# Altium PCB cs301_Group11.PcbDoc
Units mm, origin at the board's own origin, x right, y up, seen from the top; angles counter-clockwise.
Board outline 87.88 x 127 mm, 2 copper layers (Top Layer, Bottom Layer); 106 components, 62 nets, 315 pads, 24 vias.
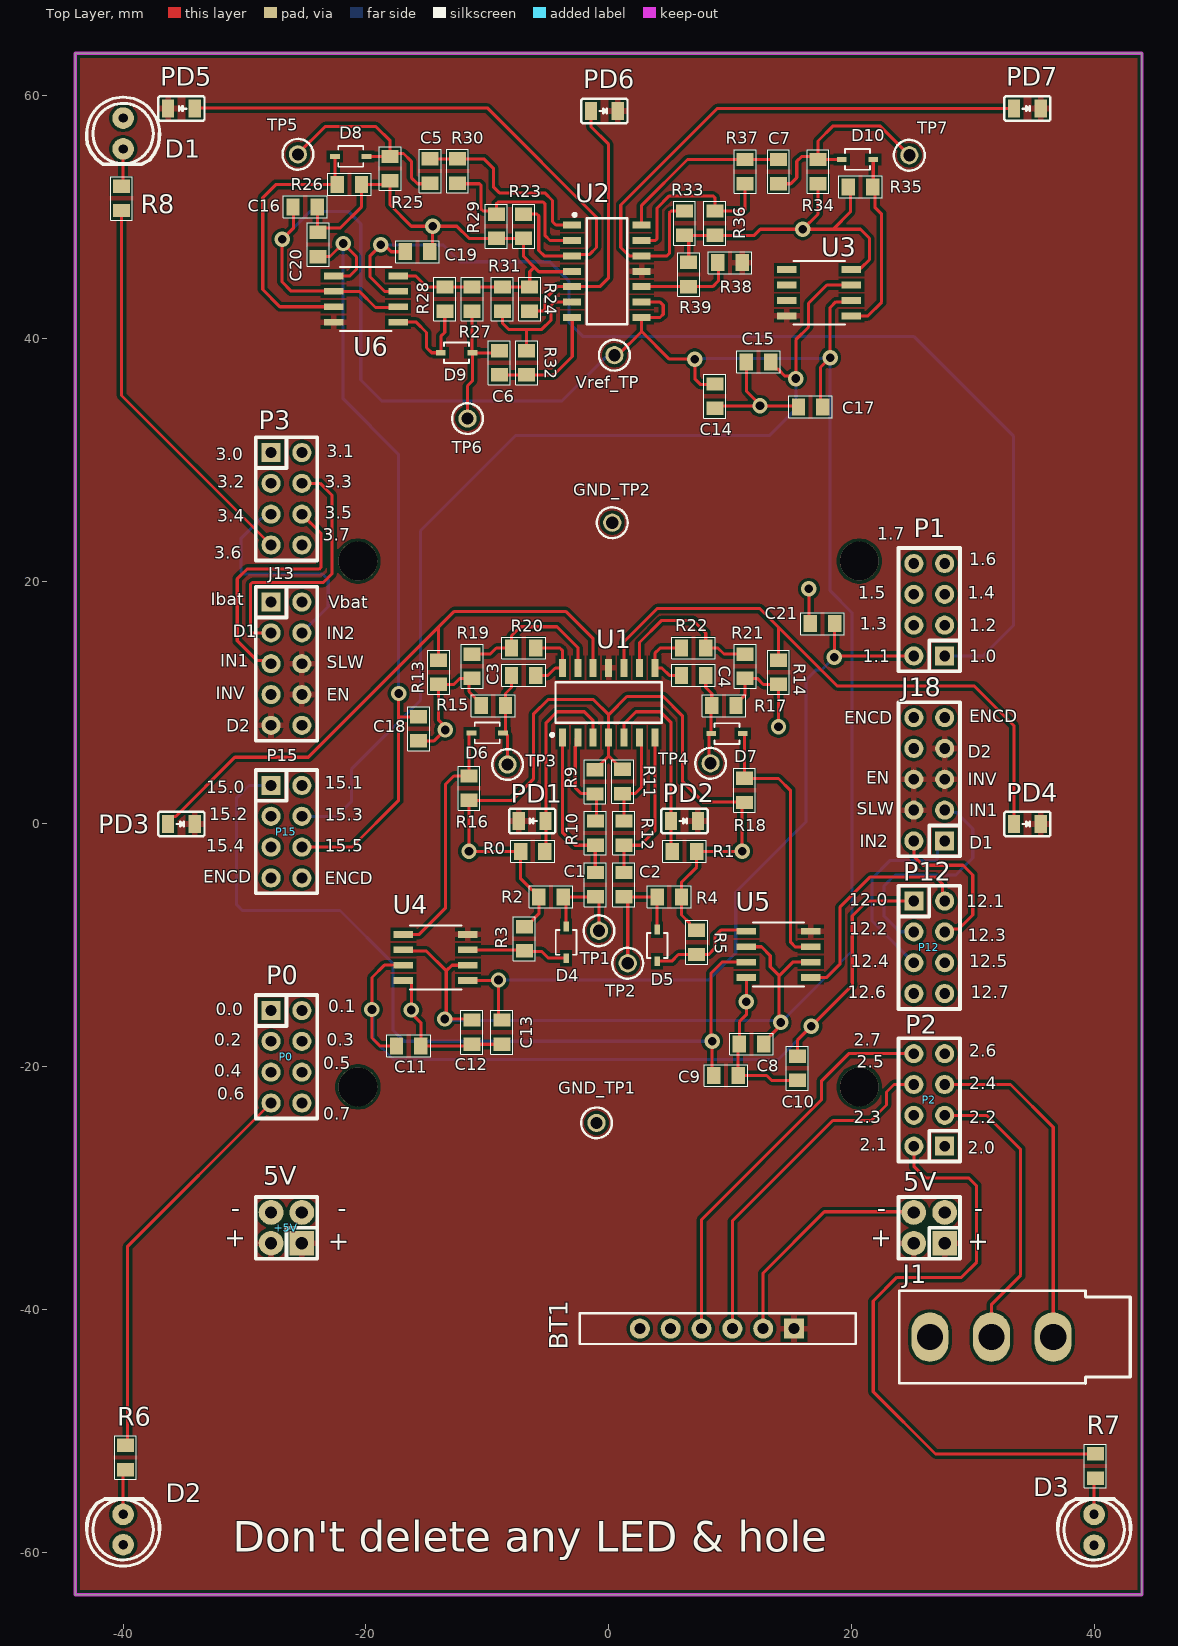
[diagram p0: Top Layer view]
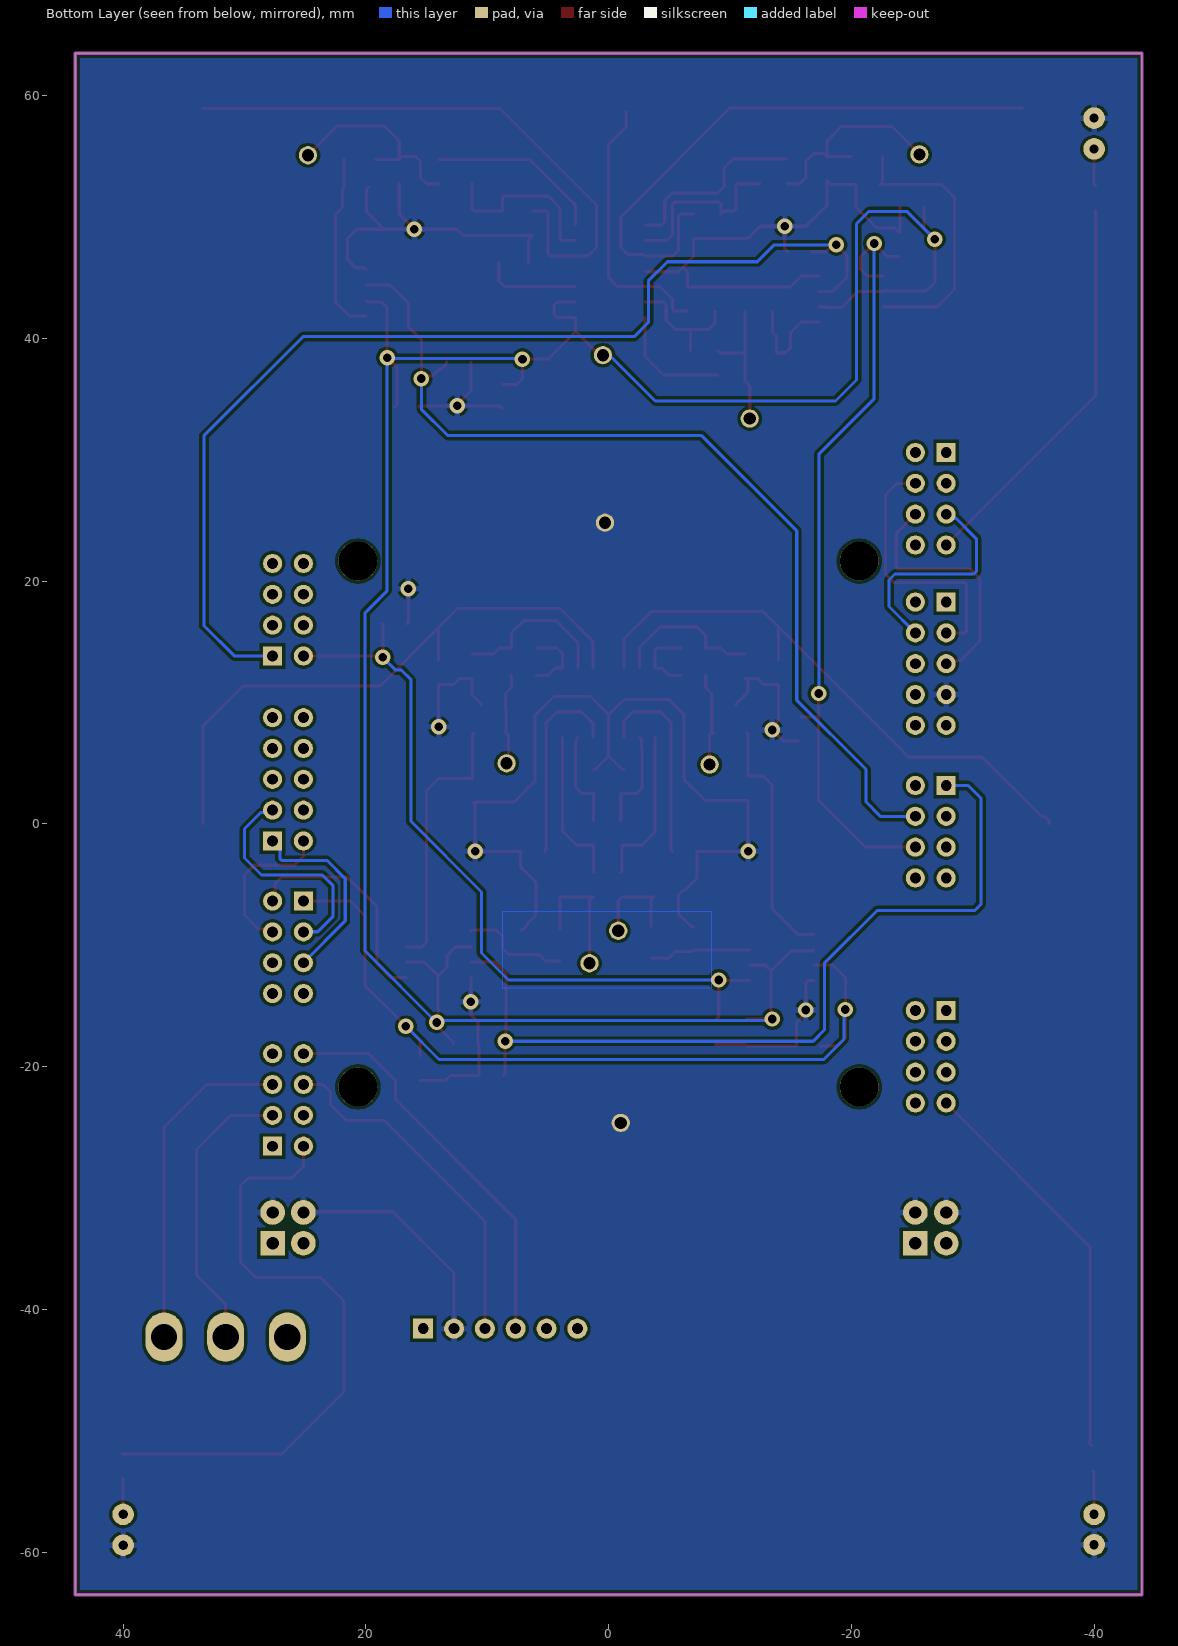
[diagram p1: Bottom Layer view, seen from below]

## Layer stack, top to bottom
Top Solder: solder mask 0.0102, Solder Resist, Dk 3.5
Top Layer: signal copper 0.0356
Dielectric1: dielectric 0.32, FR-4, Dk 4.8
Bottom Layer: signal copper 0.0356
Bottom Solder: solder mask 0.0102, Solder Resist, Dk 3.5

## Board outline
-43.942,-63.5 -43.942,63.5 43.942,63.5 43.942,-63.5

## Design rules (kind name [scope] priority, off if disabled: settings)
Clearance [All] p1: gap=0.254 ignorepadtopadclearanceinfootprint=FALSE except(0: Arc-Hole Track-Hole SMDPad-Hole THPad-Hole Via-Hole Fill-Hole Poly-Hole Region-Hole Text-Hole)
Height [All] p1: minheight=0 maxheight=34.5 prefheight=12.7
HoleSize [All] p1: absolutevalues=TRUE maxlimit=3.2 minlimit=0.025 maxpercent=80.000 minpercent=20.000
PolygonConnect [All] p1: connectstyle=Relief reliefconductorwidth=0.508 reliefentries=4 polygonreliefangle="90 Angle" airgapwidth=0.254
RoutingVias [All] p1: holewidth=0.711 width=1.27 viastyle="Through Hole" minholewidth=0.711 minwidth=1.27 maxholewidth=0.711 maxwidth=1.27
SilkToSilkClearance [All] p1: silktosilkclearance=0.05
SilkToSolderMaskClearance SilkscreenOverComponentPads [IsPad] p1: minsilkscreentomaskgap=0.1 clearancetoexposedcopper=TRUE
SolderMaskExpansion [All] p1: expansion=0.102 istentingtop=FALSE
Width [All] p1: maxlimit=0.762 minlimit=0.254 preferedwidth=0.254 minimp=50.000000 maximp=50.000000 favimp=50.000000
26 further rules are at their usual default settings.

## Classes and differential pairs
component class Sensors: C1 C2 C3 C4 C5 C6 C7 D4 D5 D6 D7 D8 D9 D10 PD1 PD2 PD3 PD4 PD5 PD6 PD7 R0 R1 R2 R3 R4 R5 R9 R10 R11 R12 R13 R14 R15 R16 R17 R18 R19 R20 R21 R22 R23 R24 R25 R26 R27 R28 R29 R30 R31 R32 R33 R34 R35 R36 R37 TP1 TP2 TP3 TP5 TP6 TP7 U1 U2 U3 U4 U5 U6

## Components (designator, comment, footprint, x,y, rotation, side; value= is the part's Value field where it differs from the comment)
5V "5V" IDC4 27.686,-34.544 r90 top locked
+5V "5V" IDC4 -25.273,-34.544 r90 top locked
BT1 "BLE Module Header" HM10_HDR1X6 15.275,-41.575 r180 top
C1 "*" "0805 CAP" -1.1,-5 r270 top
C2 "*" "0805 CAP" 1.25,-5 r270 top
C3 "*" "0805 CAP" -7,12.25 r180 top
C4 "*" "0805 CAP" 7,12.25 r0 top
C5 "*" "0805 CAP" -14.704,53.804 r270 top
C6 "*" "0805 CAP" -9,38 r90 top
C7 "*" "0805 CAP" 14,53.75 r270 top
C8 "*" "0805 CAP" 11.775,-18.125 r180 top
C9 "*" "0805 CAP" 9.675,-20.725 r180 top
C10 "*" "0805 CAP" 15.55,-20.125 r270 top
C11 "*" "0805 CAP" -16.475,-18.275 r0 top
C12 "*" "0805 CAP" -11.275,-17.15 r270 top
C13 "*" "0805 CAP" -8.8,-17.15 r270 top
C14 "*" "0805 CAP" 8.75,35.25 r270 top
C15 "*" "0805 CAP" 12.35,38.075 r180 top
C16 "*" "0805 CAP" -25,50.85 r0 top
C17 "*" "0805 CAP" 16.638,34.375 r180 top
C18 "*" "0805 CAP" -15.65,7.85 r270 top
C19 "*" "0805 CAP" -15.75,47.15 r0 top
C20 "*" "0805 CAP" -23.925,47.75 r90 top
C21 "*" "0805 CAP" 17.625,16.5 r180 top
D1 "LED" LED0.1/5MM#1 -40,55.62 r180 top locked
D2 "LED" LED0.1/5MM#2 -40,-56.88 r0 top locked
D3 "LED" LED0.1/5MM#1 40,-56.88 r0 top locked
D4 "BAT54JFILM" CR_SOD323_BAT54_STM -3.5,-9.75 r270 top
D5 "BAT54JFILM" CR_SOD323_BAT54_STM 4,-10 r270 top
D6 "BAT54JFILM" CR_SOD323_BAT54_STM -10,7.5 r180 top
D7 "BAT54JFILM" CR_SOD323_BAT54_STM 9.75,7.45 r0 top
D8 "BAT54JFILM" CR_SOD323_BAT54_STM -21.25,55 r180 top
D9 "BAT54JFILM" CR_SOD323_BAT54_STM -12.525,38.825 r180 top
D10 "BAT54JFILM" CR_SOD323_BAT54_STM 20.5,54.75 r0 top
GND_TP1 "5003" TP_TH -1,-24.625 r0 top
GND_TP2 "5003" TP_TH 0.3,24.825 r90 top
J1 "Phonejack2" ece-PHONEJACK/6-V2 36.63,-42.275 r180 top
J13 "CON10" IDC10 -27.813,18.288 r270 top locked
J18 "CON10" IDC10 27.686,-1.397 r90 top locked
P0 "P0" idc8 -27.813,-15.367 r270 top locked
P1 "P1" idc8 27.686,13.843 r90 top locked
P2 "P2" idc8 27.686,-26.543 r90 top locked
P3 "P3" idc8 -27.813,30.607 r270 top locked
P12 "P12" idc8 25.146,-6.35 r270 top locked
P15 "P15" IDC8 -27.813,3.175 r270 top locked
PD1 "SD019" SD019 -6.3,0.25 r180 top
PD2 "SD019" SD019 6.25,0.25 r0 top
PD3 "SD019" SD019 -35.196,0 r0 top
PD4 "SD019" SD019 34.504,0 r0 top
PD5 "SD019" SD019 -35.196,58.946 r180 top
PD6 "SD019" SD019 -0.346,58.746 r0 top
PD7 "SD019" SD019 34.504,58.946 r0 top
R0 "*" "0805 RES" -6.25,-2.25 r0 top
R1 "*" "0805 RES" 6.25,-2.25 r180 top
R2 "*" "0805 RES" -4.75,-6 r0 top
R3 "*" "0805 RES" -6.946,-9.454 r270 top
R4 "*" "0805 RES" 5,-6 r180 top
R5 "*" "0805 RES" 7.25,-9.75 r270 top
R6 "*" "0805 RES" -39.8,-52.2 r270 top
R7 "*" "0805 RES" 40.1,-52.9 r90 top
R8 "*" "0805 RES" -40.132,51.546 r270 top
R9 "*" "0805 RES" -1.125,3.475 r90 top
R10 "*" "0805 RES" -1.1,-0.75 r270 top
R11 "*" "0805 RES" 1.15,3.5 r90 top
R12 "*" "0805 RES" 1.25,-0.75 r270 top
R13 "*" "0805 RES" -14,12.5 r90 top
R14 "*" "0805 RES" 14,12.5 r90 top
R15 "*" "0805 RES" -9.5,9.75 r0 top
R16 "*" "0805 RES" -11.5,2.95 r90 top
R17 "*" "0805 RES" 9.5,9.75 r180 top
R18 "*" "0805 RES" 11.2,2.775 r90 top
R19 "*" "0805 RES" -11.25,13 r270 top
R20 "*" "0805 RES" -7,14.5 r0 top
R21 "*" "0805 RES" 11.25,13 r270 top
R22 "*" "0805 RES" 7,14.5 r180 top
R23 "*" "0805 RES" -7,49.25 r90 top
R24 "*" "0805 RES" -6.5,43.25 r270 top
R25 "*" "0805 RES" -18,54 r90 top
R26 "*" "0805 RES" -21.355,52.705 r180 top
R27 "*" "0805 RES" -11.25,43.25 r270 top
R28 "*" "0805 RES" -13.5,43.25 r270 top
R29 "*" "0805 RES" -9.25,49.25 r270 top
R30 "*" "0805 RES" -12.454,53.804 r90 top
R31 "*" "0805 RES" -8.75,43.25 r90 top
R32 "*" "0805 RES" -6.75,38 r270 top
R33 "*" "0805 RES" 6.25,49.5 r90 top
R34 "*" "0805 RES" 17.25,53.75 r90 top
R35 "*" "0805 RES" 20.75,52.5 r0 top
R36 "*" "0805 RES" 8.75,49.5 r270 top
R37 "*" "0805 RES" 11.25,53.75 r90 top
R38 "820k" "0805 RES" 10,46.25 r0 top
R39 "68k" "0805 RES" 6.6,45.275 r270 top
TP1 "5003" TP_TH -0.793,-8.796 r0 top
TP2 "5003" TP_TH 1.575,-11.475 r0 top
TP3 "5003" TP_TH -8.325,4.9 r0 top
TP4 "5003" TP_TH 8.4,5 r0 top
TP5 "5003" TP_TH -25.6,55.175 r0 top
TP6 "5003" TP_TH -11.625,33.4 r0 top
TP7 "5003" TP_TH 24.775,55.1 r0 top
U1 "LM324DR2G" SOIC-14 0,10 r90 top
U2 "LM324DR2G" SOIC-14 -0.14,45.54 r0 top
U3 "LM393EDR2G" SOIC8_4X5_ONS 17.342,43.77 r0 top
U4 "LM393EDR2G" SOIC8_4X5_ONS -14.25,-11 r180 top
U5 "LM393EDR2G" SOIC8_4X5_ONS 14,-10.75 r180 top
U6 "LM393EDR2G" SOIC8_4X5_ONS -20,43.25 r0 top
Vref_TP "5003" TP_TH 0.475,38.625 r0 top

## Footprints (in the part's own frame and the unit in brackets; to place one, negate y for a bottom-side part, rotate by r counter-clockwise, add the part's x,y. Pads: shape width x height; smd on the part's side, far side on the other; paste and mask are expansions set on the pad)
"0805 CAP" [mm] "http://www.digikey.co.nz/Web%20Export/Supplier%20Content/Vishay_8026/PDF/VishayBeyschlag_SolderPad.pdf?redirected=1 with dimension G modified by +0.25mm"
  rect 1.1x1.4 smd: 1(-1,0) 2(1,0)
  silkscreen extent -1.8,-0.9 1.8,0.9, body extent -1.04,-0.66 1.04,0.66, height 0.61
"0805 RES" [mm] "http://www.digikey.co.nz/Web%20Export/Supplier%20Content/Vishay_8026/PDF/VishayBeyschlag_SolderPad.pdf?redirected=1 with dimension G modified by +0.25mm"
  rect 1.1x1.4 smd: 1(-1,0) 2(1,0)
  silkscreen extent -1.8,-0.9 1.8,0.9, body extent -1.04,-0.66 1.04,0.66, height 0.61
CR_SOD323_BAT54_STM [mil]
  rect 31.5x17 smd paste+0 mask+0: 1(-51.25,0) 2(51.25,0)
  silkscreen extent -41,-34 41,34, body extent -53,-29 53,29, height 46
ece-PHONEJACK/6-V2 [mil]
  oval 120x160 hole 85: 1(200,0) 2(0,0) 3(400,0)
  silkscreen extent -250,-150 500,150
HM10_HDR1X6 [mil] "Connector; Header; 6 Position"
  rect 65x65 hole 35.43: 1(0,0)
  round 65 hole 35.43: 2(100,0) 3(200,0) 4(300,0) 5(400,0) 6(500,0)
  silkscreen extent -200,-50 695,50, body extent -142,-976 571,972, height 1358
IDC4 [mil]
  rect 80x80 hole 40: 1(0,0)
  round 80 hole 40: 2(0,100) 3(100,0) 4(100,100)
  silkscreen extent -50,-50 150,150
idc8 [mil]
  rect 62x62 hole 35: 1(0,0)
  round 62 hole 35: 2(0,100) 3(100,0) 4(100,100) 5(200,0) 6(200,100) 7(300,0) 8(300,100)
  silkscreen extent -50,-50 350,150
IDC8 [mil]
  rect 62x62 hole 35: 1(0,0)
  round 62 hole 35: 2(0,100) 3(100,0) 4(100,100) 5(200,0) 6(200,100) 7(300,0) 8(300,100)
  silkscreen extent -50,-50 350,150
IDC10 [mil]
  rect 62x62 hole 35: 1(0,0)
  round 62 hole 35: 2(0,100) 3(100,0) 4(100,100) 5(200,0) 6(200,100) 7(300,0) 8(300,100) 9(400,0) 10(400,100)
  silkscreen extent -50,-50 450,150
LED0.1/5MM#1 [mil]
  round 70 hole 30: A(0,0) K(0,-100)
  silkscreen extent -118,-168 118,50
LED0.1/5MM#2 [mil]
  round 70 hole 30: A(0,0) K(0,-98.43)
  silkscreen extent -118,-168 118,50
SD019 [mm]
  rect 1x1.5 smd: 1(-1.1,0) 2(1.1,0)
  silkscreen extent -1.9,-1 1.9,1, body extent -1,-0.63 1,0.63, height 1.1
SOIC8_4X5_ONS [mil]
  rect 63x22 smd paste+0 mask+0: 1(-104.5,75) 2(-104.5,25) 3(-104.5,-25) 4(-104.5,-75) 5(104.5,-75) 6(104.5,-25) 7(104.5,25) 8(104.5,75)
  silkscreen extent -84,-104 84,104, body extent -122,-99 122,99, height 69
SOIC-14 [mm] "SOIC, 14-Leads, Body 8.75x4mm, Pitch 1.27mm"
  rect 1.48x0.58 smd: 1(-2.86,3.81) 2(-2.86,2.54) 3(-2.86,1.27) 4(-2.86,0) 5(-2.86,-1.27) 6(-2.86,-2.54) 7(-2.86,-3.81) 8(2.86,-3.81) 9(2.86,-2.54) 10(2.86,-1.27) 11(2.86,0) 12(2.86,1.27) 13(2.86,2.54) 14(2.86,3.81)
  silkscreen extent -2.78,-4.38 1.67,4.77, body extent -3.1,-4.38 3.1,4.37, height 1.75
TP_TH [mm] "Test Point, Through Hole, Dia 2.54mm"
  round 1.5 hole 1: 1(0,0)
  silkscreen extent -1.27,-1.27 1.27,1.27, body extent -1.27,-1.27 1.27,1.27, height 4.57

## Part data
5V +5V: library part CON4, "Connector"
BT1: library part BLEModule_TH, "2.54mm pitch 6-pin header for BLE module", LatestRevisionDate=17-Jul-2002, LatestRevisionNote="Re-released for DXP Platform.", Publisher="Altium Limited"
C1 C2 C3 C4 C5 C6 C7 C8 C9 C10 C11 C12 C13 C14 C15 C16 C17 C18 C19 C20 C21: library part CerCap_SMT_0805, "SMT ceramic capacitor 0805 size"
D4 D5 D6 D7 D8 D9 D10: "No Description Available", Mfr_Name=STMicroelectronics
GND_TP1 GND_TP2 TP1 TP2 TP3 TP4 TP5 TP6 TP7 Vref_TP: library part TestPoint, "Test Point, Orange, 1-Pin THD, RoHS", Forward Current="3 A", Forward Voltage="1.08 V", Max Operating Temperature="150 degC", Max Surge Current="80 A", Min Operating Temperature="-65 degC", Package Quantity=500, Peak Reverse Current="600 uA", ComponentLink1Description="Manufacturer URL", ComponentLink1URL=http://www.keyelco.com/, ComponentLink2Description=Datasheet, ComponentLink2URL=http://keyelco.com/userAssets/file/M65p56.pdf, DatasheetVersion=Jun-15, Diameter="5.3 mm", Height="0.25 inch", Length="9.5 mm", Mount="Through Hole", PackageDescription="1-Pin Through Hole Device, Dia 2.54 mm", PackageReference=5003, Packaging=Bulk, Pins=2, Radiation Hardening=No, REACH SVHC="No SVHC", RoHSCompliant=true, Weight="0.01 lb", Width="0.25 inch"
J13 J18: "Connector"
P0 P1 P2 P3: library part CON8, "Connector"
P12 P15: library part CON8_1, "Connector"
R0 R1 R2 R3 R4 R5 R6 R7 R8 R9 R10 R11 R12 R13 R14 R15 R16 R17 R18 R19 R20 R21 R22 R23 R24 R25 R26 R27 R28 R29 R30 R31 R32 R33 R34 R35 R36 R37 R38 R39: library part Res_SMT_0805, "0805 resistor", ComponentLink1Description=https://nz.mouser.com/datasheet/2/315/AOA0000C304-1149620.pdf, LatestRevisionDate=17-Jul-2002, LatestRevisionNote="Re-released for DXP Platform.", PackageReference=AXIAL-0.4, Published=8-Jun-2000, Publisher="Altium Limited"
U1 U2: library part LM324DR_SMT_SOIC16, "Single Supply Quad Operational Amplifier, 3 to 32 V, 0 to 70 degC, 14-Pin SOIC, Pb-Free, Tape and Reel", Manufacturer="On Semiconductor", ComponentLink1Description="Manufacturer URL", ComponentLink1URL=http://www.onsemi.com/, ComponentLink2Description=Datasheet, ComponentLink2URL=http://www.onsemi.cn/pub_link/Collateral/LM324-D.PDF, ComponentLink3Description="Package Specification", ComponentLink3URL=http://www.onsemi.com/pub_link/Collateral/751A-03.PDF, DatasheetVersion="Rev. 25", Mounting Technology="Surface Mount", PackageDescription="14-Pin Small Outline Integrated Circuit, Body 8.65 x 3.9 mm, Pitch 1.27 mm", PackageReference=SOIC-14-751A-03, PackageVersion="Rev. K, 05/2011", Packing="Tape and Reel", PartNumber=LM324DR2G, RoHS=TRUE, VCC Max (V)=32, VCC Min (V)=3

## Free pads (board coordinates)
  round 3.2 hole 3.2 unplated: 1(-20.65,-21.666) 1(-20.65,21.666) 1(20.65,-21.666) 1(20.65,21.666)

## Via types
v1: diameter 1.27, hole 0.711, Top Layer to Bottom Layer, 24 vias

## Nets (pads, with @x,y where several pads share a name; then routed paths per layer and width w, separated by ;. In a path a pad name is that pad's centre, name@x,y a point inside that pad or via, vN(x,y) a via of type N, cw(c..) or ccw(c..) an arc to the next point about the centre after c; other vN are vias at no path point)
1.0: C19.1 P1.1 U6.7 | length 91
  Top Layer w0.254: U6.7 -18.46,43.885 -19.65,45.075 -19.65,46.828 v1(-18.761,47.717) -18.486,47.717 -17.919,47.15 C19.1
  Bottom Layer w0.254: v1(-18.761,47.717) -13.642,47.717 -12.25,46.325 -4.85,46.325 -3.275,44.75 -3.275,41.325 -2.1,40.15 25.175,40.15 33.35,31.975 33.35,16.35 30.85,13.85 27.693,13.85 P1.1
1.1: C13.1 C21.1 P1.2 U4.1 | length 63.8
  Top Layer w0.254: U4.1 -11.568,-12.878 -9.103,-12.878 v1(-9.075,-12.85) -9.075,-15.875 C13.1 ; C21.1 18.6,16.475 v1(18.6,13.725) 18.718,13.843 P1.2
  Bottom Layer w0.254: v1(-9.075,-12.85) 8.251,-12.85 10.475,-10.626 10.475,-5.6 16.275,0.2 16.275,11.875 17.103,12.703 17.578,12.703 v1(18.6,13.725)
12.0: C10.1 C11.1 P12.1 U4.7 | length 69.7
  Top Layer w0.254: C11.1 -18.85,-18.275 -19.5,-17.625 v1(-19.5,-15.284) -19.5,-12.649 -18.481,-11.63 -16.909,-11.63 U4.7 ; C10.1 15.55,-17.825 v1(16.7,-16.675) 20.082,-13.293 20.082,-13.082 20.075,-13.075 20.075,-7.575 21.3,-6.35 P12.1
  Bottom Layer w0.254: v1(-19.5,-15.284) -19.397,-15.387 -19.397,-17.728 -17.725,-19.4 13.975,-19.4 v1(16.7,-16.675)
12.1: P12.2 U5.1 | length 18.8
  Top Layer w0.254: U5.1 17.945,-12.655 19.075,-11.525 19.075,-6.825 21.525,-4.375 26.95,-4.375 27.5,-4.925 27.5,-6.164 P12.2
15.0: C9.2 P15.1 U5.7 | length 70.9
  Top Layer w0.254: C9.2 8.525,-20.575 v1(8.525,-17.9) 8.45,-17.825 8.45,-12.275 9.34,-11.385 U5.7
  Bottom Layer w0.254: P15.1 -29.625,3.175 -30.675,2.125 -30.675,-6.625 -30.175,-7.125 -22.125,-7.125 -17.775,-11.475 -17.775,-16.975 -16.85,-17.9 v1(8.525,-17.9)
15.3: C15.1 P15.4 U3.7 | length 80.4
  Top Layer w0.254: C15.1 13.35,37.925 13.773,37.502 13.923,37.502 14.531,36.894 15.231,36.894 v1(15.425,36.7) 15.425,39.889 16.475,40.939 16.475,42.9 17.98,44.405 U3.7
  Bottom Layer w0.254: P15.4 -22.39,0.635 -21.2,1.825 -21.2,4.5 -15.5,10.2 -15.5,24.15 -7.625,32.025 13.275,32.025 15.425,34.175 v1(15.425,36.7)
15.5: C18.1 C20.1 P15.6 U6.1 | length 66
  Top Layer w0.254: P15.6 -25.268,-1.9 -21.15,-1.9 -17.3,1.95 -17.3,8.825 ; C20.1 -22.95,46.75 v1(-21.875,47.825) -20.775,46.725 -20.775,45.7 -21.32,45.155 U6.1 ; v1(-17.3,10.75) -17.3,8.825 ; C18.1@-15.8,8.85 -15.825,8.825 -17.3,8.825
  Bottom Layer w0.254: v1(-21.875,47.825) -21.875,35.025 -17.325,30.475 -17.325,10.775 v1(-17.3,10.75)
+5V: 5V.1 5V.2 +5V.1 +5V.2 BT1.1 J13.6 J13.8 J13.9 J18.4 J18.5 J18.6 J18.7 PD1.2 PD2.2 PD3.2 PD4.2 PD5.2 PD6.2 PD7.2 R38.2 U1.11 U2.11 U3.4 U4.4 U5.4 U6.4
GND: 5V.3 5V.4 +5V.3 +5V.4 BT1.2 C8.2 C9.1 C10.2 C11.2 C12.2 C13.2 C14.2 C15.2 C16.2 C17.2 C18.2 C19.2 C20.2 C21.2 D1.K D2.K D3.K GND_TP1.1 GND_TP2.1 J13.7 R0.1 R1.1 R2.1 R3.1 R4.1 R5.1 R9.2 R11.2 R13.1 R14.1 R15.1 R16.1 R17.1 R18.1 R19.2 R21.2 R23.1 R24.1 R25.1 R26.1 R27.1 R28.1 R29.2 R31.2 R33.1 R34.1 R35.1 R36.2 R39.1 U1.4 U2.4 U3.8 U4.8 U5.8 U6.8 | length 232.7
  Top Layer w0.254: C16.2 -24,48.825 C20.2 -23.575,49.1 -22.1,49.1 -20.375,50.825 -20.375,52.635 -20.4,52.66 R26.1 -18.295,52.705 R25.1 -18,51 -16.25,49.25 v1(-14.5,49.25) ; U6.8 -15.88,45.155 -14.975,44.25 R28.1 R27.1 R31.2 R24.1 -6.5,45.5 -6.125,45.875 ; U4.8 -16.402,-12.905 -16.25,-13.057 v1(-16.25,-15.325) -16.25,-15.6 -15.475,-16.375 C11.2 -11.4,-18.275 C12.2 C13.2 ; C18.2 -14.375,6.85 v1(-13.475,7.75) -13.475,8.025 -14,8.55 R13.1 -12.75,11.5 -12.25,12 R19.2 -11.5,11.75 -11.5,10.9 -10.5,9.9 R15.1 ; C19.2 -14.5,47.4 v1(-14.5,49.25) ; R3.1 -6.796,-8.454 -5.75,-7.408 R2.1 -5.75,-5.85 -6.173,-5.427 -6.323,-5.427 -7.275,-4.475 -7.275,-2.275 R0.1 v1(-11.5,-2.25) R16.1 -11.475,1.925 -7.975,1.925 -6.2,3.7 -6.2,9.05 -5,10.25 -1.25,10.25 0,9 ; U2.4 -3.04,45.5 -5.75,45.5 -6.125,45.875 ; R9.2@-1.25,4.5 -1.1,4.5 0,5.6 ; R11.2@1.25,4.5 R11.2 1.1,4.5 0,5.6 ; R39.1 6.6,48.15 R33.1 R36.2 12,48.5 12.5,49 v1(16,49) ; R5.1 7.1,-8.75 6.677,-8.327 6.677,-8.177 6,-7.5 R4.1 6,-4.8 7.25,-3.55 R1.1 v1(11,-2.25) 11,1.6 R18.1@11.175,1.775 ; C14.2 8.95,34.45 v1(12.475,34.45) ; R17.1 10.5,9.9 11.25,10.65 R21.2 12.25,12 12.75,11.5 R14.1 v1(14,8) ; R18.1@11.025,1.825 11,1.8 7.8,1.8 6.075,3.525 6.075,8.925 4.5,10.5 1.5,10.5 0,9 ; U5.8 11.35,-12.659 v1(11.35,-14.65) 11.35,-15.725 10.775,-16.3 C8.2 10.675,-18.225 C9.1 13.025,-20.725 13.425,-21.125 C10.2 ; C15.2 11.35,35.675 12.475,34.55 v1(12.475,34.45) ; BT1.2@12.735,-41.725 BT1.2 12.735,-36.99 17.775,-31.95 25.092,-31.95 5V.4 ; C17.2 15.563,34.45 v1(12.475,34.45) ; v1(16.5,19.375) 16.5,16.625 C21.2 ; R34.1 17.25,50.25 v1(16,49) ; R35.1 19.932,52.318 19.932,50.432 18.5,49 ; U3.8 20.148,45.828 20.828,45.828 21.5,46.5 21.5,48.25 20.75,49 18.5,49 ; v1(-14.5,49.25) -12.5,49.25 -11.5,48.25 R29.2 R23.1 -7,46.75 -6.125,45.875 ; 0,5.6 U1.4 0,9 ; v1(16,49) 18.5,49
M1_D1: J13.3 P3.4 | length 22
  Top Layer w0.254: J13.3 -29.351,15.748 -29.5,15.897 -29.5,19.751 -29.351,19.9 -23.5,19.9 -22.8,20.6 -22.8,27.1 -23.767,28.067 P3.4
M1_IN1: J13.5 P3.6 | length 21
  Top Layer w0.254: J13.5 -28.066,13.461 -28.961,13.461 -30.6,15.1 -30.6,20.2 -29.8,21 -23.849,21 -23.7,21.149 -23.7,23.954 P3.6
M1_IN2: J13.4 P3.5 | length 18.8
  Bottom Layer w0.254: P3.5 -28.17,25.527 -28.513,25.185 -28.615,25.185 -30.3,23.5 -30.3,20.8 -30.1,20.6 -23.6,20.6 -23.1,20.1 -23.1,17.921 J13.4
M2_D1: J18.1 P12.5 | length 16.1
  Bottom Layer w0.254: P12.5 21.7,-7.984 21.7,-4.5 23.2,-3 26.94,-3 27.088,-2.851 27.088,-1.995 J18.1
M2_IN1: J18.3 P12.3 | length 19.1
  Bottom Layer w0.254: P12.3 25.134,-8.878 23.978,-8.878 22.7,-7.6 22.7,-5.1 23.6,-4.2 28.6,-4.2 30,-2.8 30,-0.4 28.644,0.956 27.873,0.956 J18.3
M2_IN2: J18.2 P12.4 | length 12.9
  Top Layer w0.254: J18.2 25.146,-2.646 25.9,-3.4 29.2,-3.4 30,-4.2 30,-7.5 28.854,-8.646 27.93,-8.646 P12.4
NetBT1_3: BT1.3 P2.6 | length 29.3
  Top Layer w0.254: BT1.3@10.195,-41.725 10.195,-32.705 18.475,-24.425 21.625,-24.425 22.9,-23.15 22.9,-22.075 23.512,-21.463 P2.6
NetBT1_4: BT1.4 P2.8 | length 33.2
  Top Layer w0.254: BT1.4@7.655,-41.725 7.655,-32.595 17.55,-22.7 17.55,-21.15 19.775,-18.925 25.144,-18.925 P2.8
NetC1_1: C1.1 R10.2 U1.1 | length 13.3
  Top Layer w0.254: U1.1 -3.81,-0.69 -2.75,-1.75 R10.2 -1.1,-3.9 C1.1@-1,-4
NetC1_2: C1.2 D4.1 R2.2 TP1.1 | length 8.1
  Top Layer w0.254: D4.1 -3.5,-6.25 R2.2 C1.2 -0.793,-6.307 TP1.1
NetC2_1: C2.1 R12.2 U1.7 | length 13
  Top Layer w0.254: C2.1 R12.2 2.625,-1.75 3.81,-0.565 U1.7
NetC2_2: C2.2 D5.1 R4.2 TP2.1 | length 11.1
  Top Layer w0.254: TP2.1 1.575,-6.325 C2.2 R4.2 D5.1
NetC3_1: C3.1 R20.2 U1.14 | length 6.2
  Top Layer w0.254: C3.1 -5,12.25 -4.39,12.86 U1.14 -3.81,14.31 -4,14.5 R20.2
NetC3_2: C3.2 D6.1 R15.2 TP3.1 | length 7.8
  Top Layer w0.254: D6.1 -8.514,7.5 -8.325,7.311 TP3.1 ; D6.1@-8.448,7.5 -8.5,7.552 R15.2 -8.5,10.75 -8,11.25 C3.2
NetC4_1: C4.1 R22.2 U1.8 | length 6
  Top Layer w0.254: C4.1 5,12.25 4.39,12.86 U1.8 3.81,14.06 4.25,14.5 R22.2
NetC4_2: C4.2 D7.1 R17.2 TP4.1 | length 7.7
  Top Layer w0.254: C4.2 8,11.25 8.5,10.75 R17.2 8.448,9.698 D7.1 8.353,7.45 8.264,7.361 8.264,5.136 TP4.1
NetC5_1: C5.1 R30.2 U2.1 | length 15.9
  Top Layer w0.254: C5.1 R30.2 -10.277,54.804 -9.5,54.027 -9.5,52.5 -9,52 -5.25,52 -4.625,51.375 -4.625,49.625 -4.5,49.5 ; -4.5,49.499 -4.351,49.35 U2.1
NetC5_2: C5.2 D8.1 R25.2 TP5.1 | length 17.6
  Top Layer w0.254: TP5.1 -25.6,55.225 -23.35,57.475 -19.175,57.475 -18,56.3 R25.2 ; D8.1 R25.2 ; C5.2 -14.758,52.75 -15.75,52.75 -16.25,53.25 -16.25,54.601 -16.899,55.25 -17.75,55.25 R25.2
NetC6_1: C6.1 R32.2 U2.7 | length 9.8
  Top Layer w0.254: C6.1 R32.2 -4.525,37 -3,38.525 U2.7
NetC6_2: C6.2 D9.1 R27.2 TP6.1 | length 11.3
  Top Layer w0.254: TP6.1 -11.625,36.1 -11.223,36.502 D9.1 ; R27.2 -11.25,38.852 D9.1 ; C6.2 -9.2,38.8 -11.198,38.8 D9.1
NetC7_1: C7.1 R37.2 U2.14 | length 14.5
  Top Layer w0.254: U2.14 2.72,50.97 6.5,54.75 R37.2 C7.1
NetC7_2: C7.2 D10.1 R34.2 TP7.1 | length 17.6
  Top Layer w0.254: C7.2 15,52.75 15.5,53.25 15.5,54.601 15.899,55 17,55 R34.2 ; D10.1 R34.2 ; TP7.1 22.35,57.525 18.5,57.525 17.25,56.275 R34.2
NetD1_A: D1.A R8.1 | length 3.1
  Top Layer w0.254: R8.1 -40,52.678 D1.A
NetD2_A: D2.A R6.2 | length 3.6
  Top Layer w0.254: D2.A -40,-53.4 R6.2@-39.9,-53.3
NetD3_A: D3.A R7.1 | length 3
  Top Layer w0.254: D3.A 40,-54 R7.1
NetD4_2: D4.2 R3.2 U4.3 | length 8.4
  Top Layer w0.254: U4.3 -7.035,-10.365 R3.2 -6.9,-10.5 -5.5,-10.5 -4.948,-11.052 D4.2
NetD5_2: D5.2 R5.2 U5.5 | length 9
  Top Layer w0.254: D5.2 5.198,-11.302 5.75,-10.75 R5.2 8.25,-10.75 8.75,-10.25 8.75,-9.25 9.25,-8.75 11.251,-8.75 U5.5
NetD6_2: D6.2 R16.2 U4.5 | length 20.5
  Top Layer w0.254: U4.5 -15.595,-9.095 -13.45,-6.95 -13.45,3.25 -12.75,3.95 R16.2 -11.5,7.411 -11.411,7.5 D6.2
NetD7_2: D7.2 R18.2 U5.3 | length 22.3
  Top Layer w0.254: D7.2 11.111,7.45 11.2,7.361 R18.2 11.225,3.75 14,3.75 15,2.75 15,-9.75 15.395,-10.145 16.625,-10.145 U5.3
NetD8_2: D8.2 R26.2 U6.3 | length 23
  Top Layer w0.254: U6.3 -27.084,42.615 -28.5,44.031 -28.5,51.601 -27.396,52.705 R26.2 -22.552,52.902 D8.2
NetD9_2: D9.2 R28.2 U6.5 | length 8.9
  Top Layer w0.254: U6.5 -15.845,41.345 -15,40.5 -15,39.25 -14.575,38.825 D9.2 -13.827,40.173 -13.5,40.5 R28.2
NetD10_2: D10.2 R35.2 U3.5 | length 15.1
  Top Layer w0.254: U3.5 21.365,41.865 22.5,43 22.5,50.25 21.932,50.818 21.932,52.318 R35.2 21.802,52.552 D10.2
NetJ1_1: J1.1 P2.3 | length 23.8
  Top Layer w0.254: P2.3 31.128,-24.003 33.95,-26.825 33.95,-37.175 31.555,-39.57 J1.1@31.555,-42.25
NetJ1_2: J1.2 P2.5 | length 27.7
  Top Layer w0.254: P2.5 33.113,-21.463 36.635,-24.985 J1.2@36.635,-42.25
NetP0_7: P0.7 R6.1 | length 33.2
  Top Layer w0.254: R6.1 -39.65,-51.05 -39.65,-34.824 P0.7
NetP2_2: P2.2 R7.2 | length 51.5
  Top Layer w0.254: P2.2 25.146,-28.196 26.1,-29.15 29.65,-29.15 30.325,-29.825 30.325,-36.1 29.075,-37.35 23.75,-37.35 21.8,-39.3 21.8,-46.775 26.925,-51.9 R7.2
NetP3_7: P3.7 R8.2 | length 32.7
  Top Layer w0.254: R8.2 -40.132,35.306 P3.7
NetPD1_1: PD1.1 R0.2 U1.3 | length 16.6
  Top Layer w0.254: R0.2 -5.15,-2.15 -5.15,0.25 -5.15,8.35 -4.25,9.25 -2,9.25 -1.27,8.52 U1.3
NetPD2_1: PD2.1 R1.2 U1.5 | length 16.4
  Top Layer w0.254: U1.5 1.27,8.27 2.25,9.25 4.25,9.25 5.15,8.35 PD2.1 5.15,-2.15 R1.2
NetPD3_1: PD3.1 R13.2 U1.12 | length 48.5
  Top Layer w0.254: PD3.1 -36.296,0.25 -35.923,0.623 -35.673,0.623 -30.796,5.5 -24.75,5.5 -14,16.25 ; R13.2 -14,16.25 ; U1.12 -1.27,15.27 -3.5,17.5 -12.75,17.5 -14,16.25
NetPD4_1: PD4.1 R14.2 U1.10 | length 50.2
  Top Layer w0.254: U1.10 1.27,15.02 4,17.75 12.45,17.75 14,16.2 ; R14.2 14,16.2 ; PD4.1 33.404,8.096 30.125,11.375 18.825,11.375 14,16.2
NetPD5_1: PD5.1 R23.2 U2.3 | length 48.7
  Top Layer w0.254: PD5.1 -34.042,59 -10,59 -1,50 -1,47.5 -1.565,46.935 -2.875,46.935 U2.3 -5.31,46.81 -5.758,47.258 -5.758,50.101 -5.907,50.25 R23.2
NetPD6_1: PD6.1 R24.2 U2.5 | length 22.5
  Top Layer w0.254: R24.2 -5.407,42.25 -5.258,42.399 -5.258,43.242 -4.23,44.27 U2.5 -0.73,44.27 0,45 0,56 -1.446,57.446 PD6.1
NetPD7_1: PD7.1 R33.2 U2.12 | length 48.2
  Top Layer w0.254: R33.2 5.149,50.5 5,50.351 5,47 4.81,46.81 U2.12 1.69,46.81 1,47.5 1,51 8.946,58.946 PD7.1
NetR9_1: R9.1 R10.1 U1.2 | length 8.2
  Top Layer w0.254: U1.2 -2.703,6.977 -2.703,6.425 -2.75,6.378 -2.75,3 -2.25,2.5 R9.1@-1.25,2.5 ; R10.1@-1,0.25 R9.1@-1,2.5
NetR11_1: R11.1 R12.1 U1.6 | length 8.2
  Top Layer w0.254: R11.1 R11.1@1.25,2.5 ; R12.1 1.25,2.4 R11.1@1.25,2.5 ; U1.6 2.703,6.977 2.703,6.4 2.725,6.378 2.725,3.05 2.175,2.5 R11.1@1.25,2.5
NetR19_1: R19.1 R20.1 U1.13 | length 12.6
  Top Layer w0.254: R19.1 -9.75,14 -9.25,14.5 R20.1 -8,15.5 -7.75,15.75 -7.25,16.25 -4.25,16.25 -2.54,14.54 U1.13
NetR21_1: R21.1 R22.1 U1.9 | length 13.4
  Top Layer w0.254: U1.9 2.54,14.96 4.33,16.75 7,16.75 8,15.75 R22.1 9,14.5 9.5,14 R21.1
NetR29_1: R29.1 R30.1 U2.2 | length 15.4
  Top Layer w0.254: R30.1 -12.4,52.75 -10.649,52.75 -10.5,52.601 -10.5,50.649 -10.351,50.5 -9.5,50.5 R29.1 -9.25,51.101 -9.101,51.25 -5.399,51.25 -5.25,51.101 -5.25,48.5 -4.83,48.08 U2.2
NetR31_1: R31.1 R32.1 U2.6 | length 10.4
  Top Layer w0.254: R31.1 -8.75,41.25 -8.25,40.75 -6.75,40.75 ; R32.1 -6.75,40.75 ; U2.6 -4.5,43 -4.75,42.75 -4.75,41.5 -5.5,40.75 -6.75,40.75
NetR36_1: R36.1 R37.1 U2.13 | length 14.9
  Top Layer w0.254: U2.13 3.851,48.08 4,48.229 4,50.75 5,51.75 8.601,51.75 8.75,51.601 R36.1 11.101,50.5 11.25,50.649 R37.1
NetR38_1: R38.1 R39.2 U2.10 | length 8
  Top Layer w0.254: U2.10 6.595,44.27 R39.2 8.575,44.275 9.05,44.75 9.05,46.2 R38.1
Vref: C8.1 C12.1 C14.1 C16.1 C17.1 U2.8 U2.9 U3.6 U4.2 U4.6 U5.2 U5.6 U6.2 U6.6 Vref_TP.1 | length 212.1
  Top Layer w0.254: C16.1 -25.975,50.825 -25.975,49.075 v1(-26.875,48.175) -26.9,48.15 -26.9,44.65 -26.15,43.9 -22.669,43.9 U6.2 -20.535,43.885 -19.2,42.55 U6.6@-17.866,42.55 ; U6.6@-17.866,42.615 U6.6 ; U4.6 -16.794,-10.475 -15,-10.475 -13.375,-12.1 ; U4.2 -12.91,-11.635 -13.375,-12.1 ; C12.1 -11.361,-16.064 v1(-13.492,-16.064) -13.375,-15.947 -13.375,-12.1 ; Vref_TP.1@0.4,38.9 Vref_TP.1@0.506,39.006 ; Vref_TP.1 0.765,38.625 2.72,40.58 ; U2.9 4.25,43 4.5,42.75 4.5,42 4.23,41.73 U2.8 2.72,40.58 ; C14.1 8.725,36.225 7.55,36.225 7.1,36.675 v1(7.1,38.3) 5,38.3 2.72,40.58 ; U5.6 12.59,-10.115 13.32,-10.845 13.32,-11.77 14.05,-12.5 ; C8.1 12.775,-17.975 14.175,-16.575 v1(14.175,-16.35) 14.05,-16.225 14.05,-12.5 ; U5.2 15.165,-11.385 14.05,-12.5 ; C17.1 17.45,34.563 17.45,37.625 v1(18.25,38.425) 18.25,42.55 18.725,43.025 19.886,43.025 U3.6
  Bottom Layer w0.254: v1(-26.875,48.175) -24.575,50.475 -21.45,50.475 -20.425,49.45 -20.425,36.575 -18.7,34.85 -3.85,34.85 -0.2,38.5 Vref_TP.1@0.475,38.5 ; v1(-13.492,-16.064) -13.349,-16.207 14.032,-16.207 v1(14.175,-16.35) 20.058,-10.467 20.058,17.417 18.25,19.225 v1(18.25,38.425) 18.187,38.362 7.163,38.362 v1(7.1,38.3)
pads on no net: BT1.5 BT1.6 J1.3 J13.1 J13.2 J13.10 J18.8 J18.9 J18.10 P0.1 P0.2 P0.3 P0.4 P0.5 P0.6 P0.8 P1.3 P1.4 P1.5 P1.6 P1.7 P1.8 P2.1 P2.4 P2.7 P3.1 P3.2 P3.3 P3.8 P12.6 P12.7 P12.8 P15.2 P15.3 P15.5 P15.7 P15.8 U3.1 U3.2 U3.3

## Polygon pours and split planes (outlines as drawn)
GND on Bottom Layer "GND_L02_P003" (solid, pour order 3): -43.949,-63.455 -43.949,63.545 43.935,63.545 43.935,-63.455
Vref on Bottom Layer "VREF_L02_P006" (solid, pour order 6): -8.5,-13.5 -8.5,-7.25 8.75,-7.25 8.75,-13.5
+5V on Top Layer "+5V_L01_P005" (solid, pour order 5): -43.942,63.5 -43.942,-63.5 43.648,-63.206 43.648,63.2

## Keep-outs
Keep-Out Layer:
  the board outline again, w0.254

## Silkscreen, mask and mechanical layers (free items; w line width, h text height)
Top Overlay:
  text "3.1" at -23.241,30.226 h1.02
  text "3.0" at -32.385,29.972 h1.02
  text "3.2" at -32.258,27.686 h1.02
  text "3.3" at -23.368,27.686 h1.02
  text "3.5" at -23.368,25.146 h1.02
  text "3.4" at -32.258,24.892 h1.02
  text "1.7" at 22.125,23.4 h1.02
  text "3.7" at -23.55,23.325 h1.02
  text "3.6" at -32.512,21.844 h1.02
  text "1.6" at 29.718,21.336 h1.02
  text "1.5" at 20.574,18.542 h1.02
  text "1.4" at 29.591,18.542 h1.02
  text "Ibat" at -32.766,18.034 h1.02
  text "Vbat" at -23.114,17.78 h1.02
  text "1.3" at 20.701,16.002 h1.02
  text "1.2" at 29.718,15.875 h1.02
  text "D1" at -30.988,15.367 h1.02
  text "IN2" at -23.241,15.24 h1.02
  text "1.1" at 20.955,13.335 h1.02
  text "1.0" at 29.718,13.335 h1.02
  text "IN1" at -32.004,12.954 h1.02
  text "SLW" at -23.241,12.827 h1.02
  text "INV" at -32.385,10.287 h1.02
  text "EN" at -23.241,10.16 h1.02
  text "ENCD" at 29.718,8.382 h1.02
  text "ENCD" at 19.431,8.255 h1.02
  text "D2" at -31.496,7.62 h1.02
  text "D2" at 29.591,5.461 h1.02
  text "EN" at 21.209,3.302 h1.02
  text "INV" at 29.591,3.175 h1.02
  text "15.1" at -23.368,2.921 h1.02
  text "15.0" at -33.147,2.54 h1.02
  text "SLW" at 20.447,0.762 h1.02
  text "IN1" at 29.718,0.635 h1.02
  text "15.2" at -32.925,0.3 h1.02
  text "15.3" at -23.368,0.254 h1.02
  text "IN2" at 20.701,-1.905 h1.02
  text "D1" at 29.718,-2.032 h1.02
  text "15.4" at -33.147,-2.286 h1.02
  text "15.5" at -23.368,-2.286 h1.02
  text "ENCD" at -33.401,-4.826 h1.02
  text "ENCD" at -23.368,-4.953 h1.02
  text "12.0" at 19.812,-6.731 h1.02
  text "12.1" at 29.464,-6.858 h1.02
  text "12.2" at 19.812,-9.144 h1.02
  text "12.3" at 29.591,-9.652 h1.02
  text "12.4" at 19.939,-11.811 h1.02
  text "12.5" at 29.718,-11.811 h1.02
  text "12.6" at 19.685,-14.351 h1.02
  text "12.7" at 29.845,-14.351 h1.02
  text "0.1" at -23.114,-15.494 h1.02
  text "0.0" at -32.385,-15.748 h1.02
  text "0.2" at -32.512,-18.288 h1.02
  text "0.3" at -23.241,-18.288 h1.02
  text "2.7" at 20.193,-18.288 h1.02
  text "2.6" at 29.718,-19.177 h1.02
  text "2.5" at 20.447,-20.066 h1.02
  text "0.5" at -23.495,-20.193 h1.02
  text "0.4" at -32.512,-20.828 h1.02
  text "2.4" at 29.718,-21.844 h1.02
  text "0.6" at -32.258,-22.733 h1.02
  text "0.7" at -23.495,-24.384 h1.02
  text "2.3" at 20.193,-24.638 h1.02
  text "2.2" at 29.718,-24.638 h1.02
  text "2.1" at 20.701,-26.924 h1.02
  text "2.0" at 29.591,-27.178 h1.02
  text "-" at -30.353,-31.242 h1.52 r180
  text "-" at -21.59,-31.242 h1.52 r180
  text "-" at 22.86,-31.242 h1.52 r180
  text "-" at 30.861,-31.242 h1.52 r180
  text "+" at -30.099,-35.052 h1.52 r90
  text "+" at 23.114,-35.052 h1.52 r90
  text "+" at -21.59,-35.306 h1.52 r90
  text "+" at 31.115,-35.306 h1.52 r90
  text "Don't delete any LED & hole" at -30.988,-59.944 h2.54

## Text inside footprints (layer, text, board x,y; h text height)
D4: Mechanical 13 "*" at -4.122,-8.912 h1.27 r270
D5: Mechanical 13 "*" at 3.378,-9.162 h1.27 r270
D6: Mechanical 13 "*" at -9.162,8.122 h1.27 r180
D7: Mechanical 13 "*" at 8.912,6.828 h1.27
D8: Mechanical 13 "*" at -20.412,55.622 h1.27 r180
D9: Mechanical 13 "*" at -11.687,39.447 h1.27 r180
D10: Mechanical 13 "*" at 19.662,54.128 h1.27
U3: Mechanical 13 "*" at 15.411,44.926 h1.27
U4: Mechanical 13 "*" at -12.32,-12.156 h1.27 r180
U5: Mechanical 13 "*" at 15.93,-11.906 h1.27 r180
U6: Mechanical 13 "*" at -21.93,44.406 h1.27